# EAGLE board breakout (EAGLE 9.6.2)
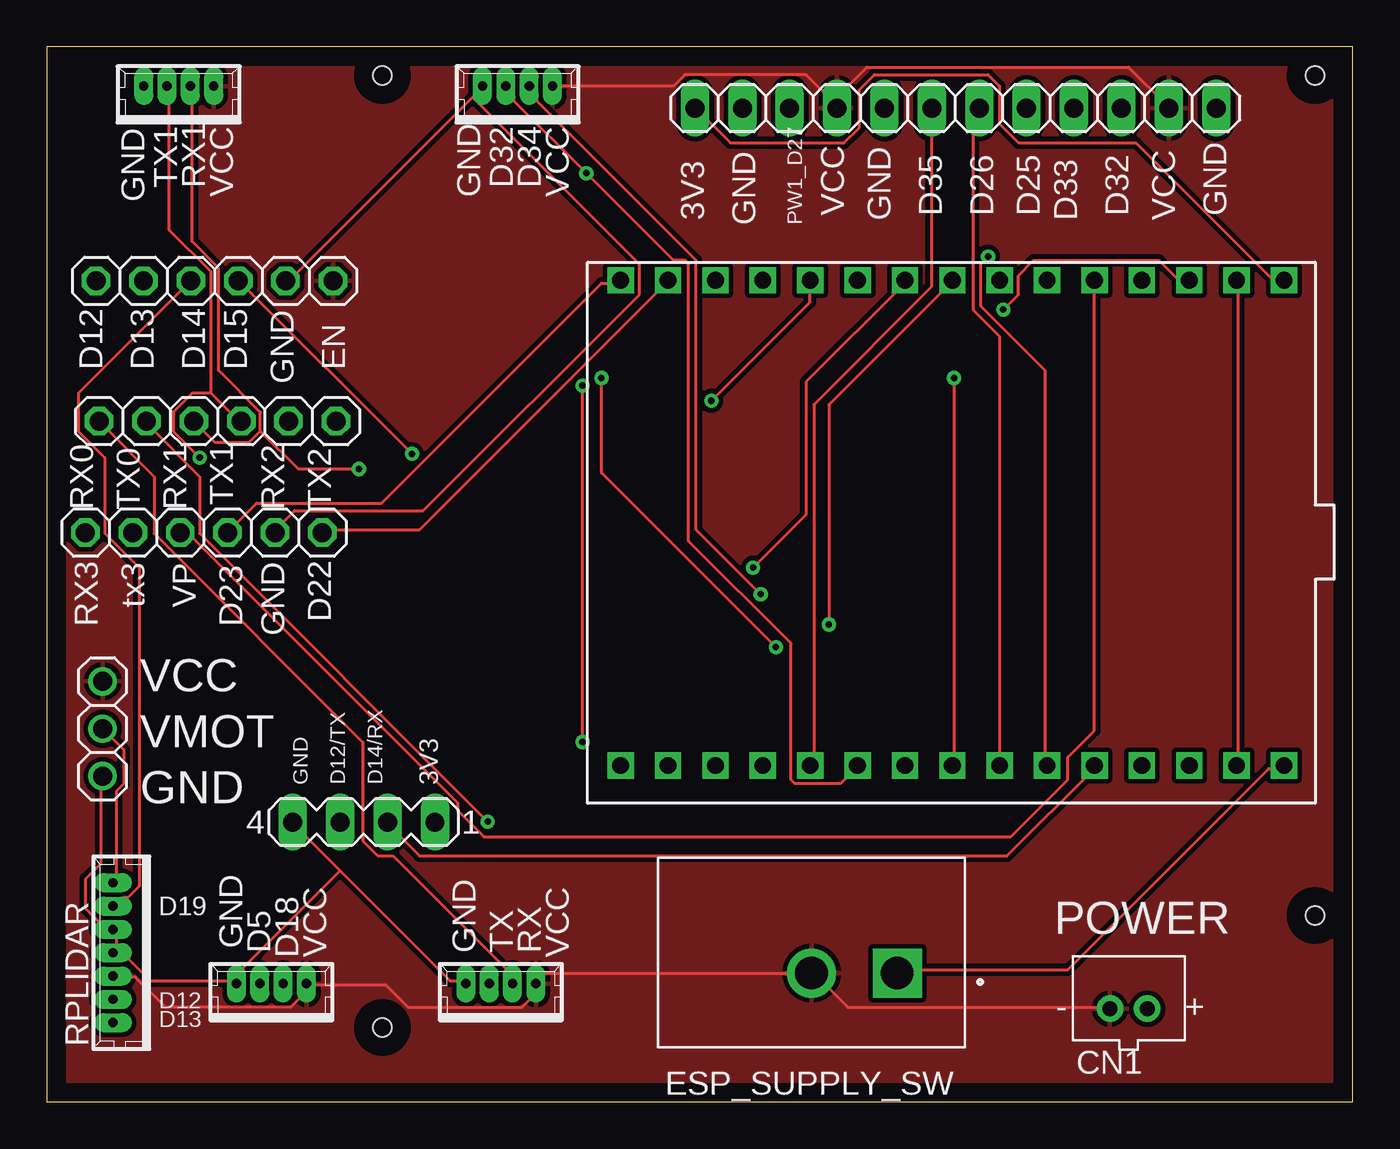
[diagram p0: board, top side]
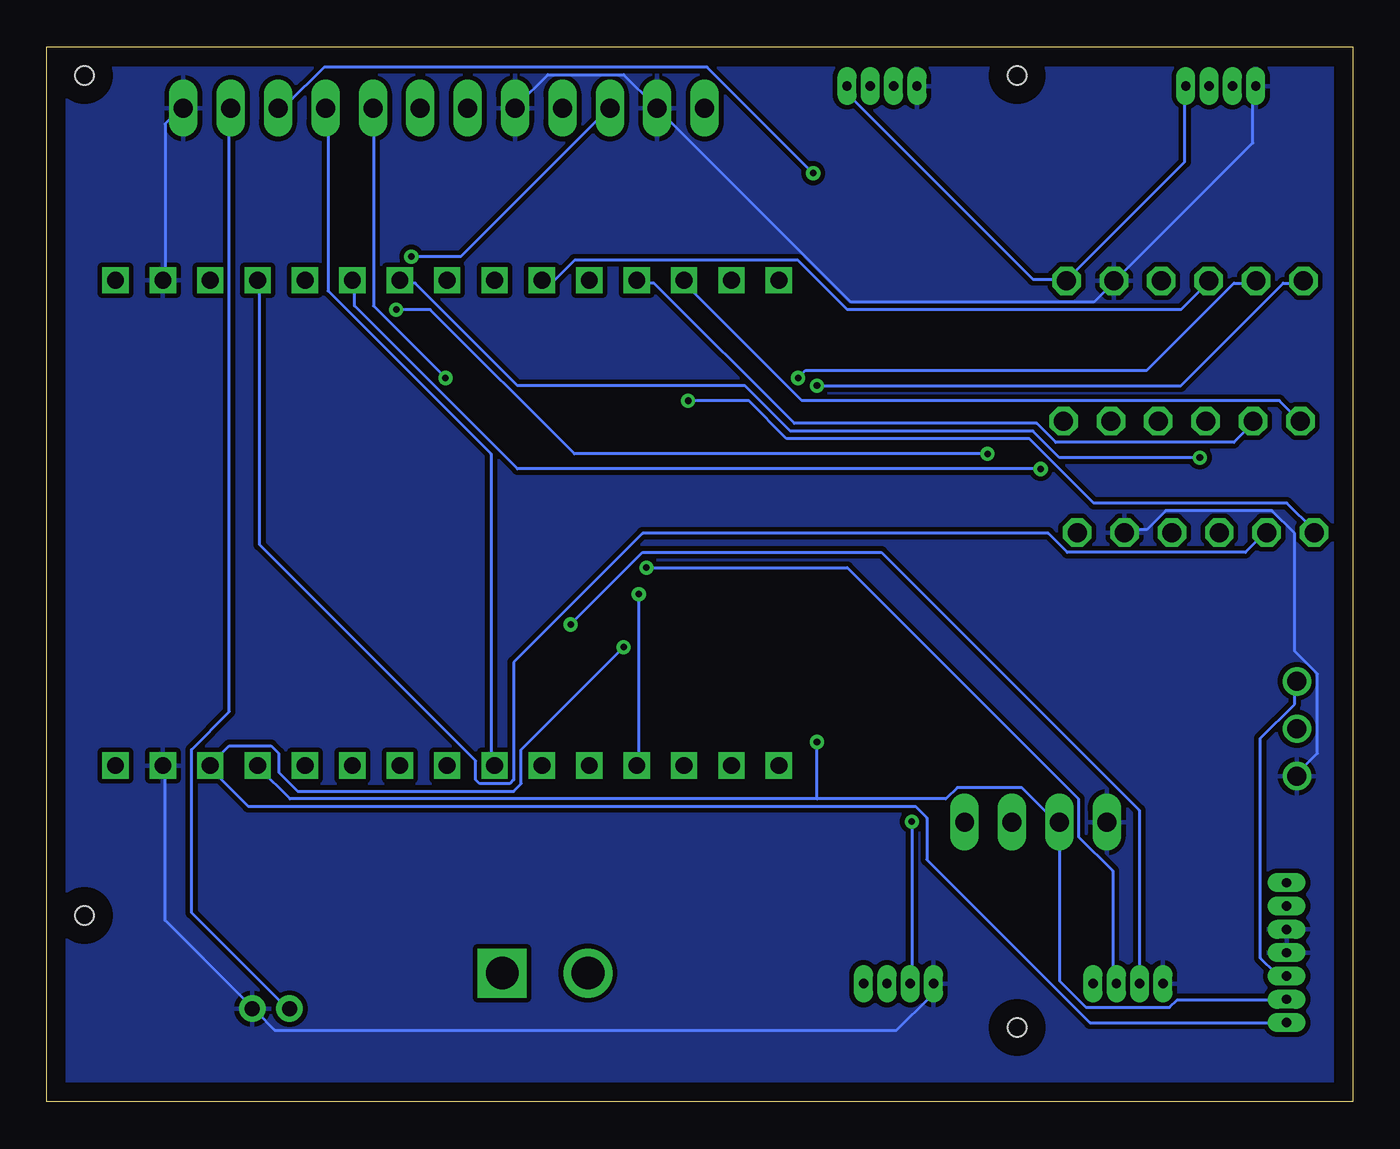
[diagram p1: board, bottom side, seen from below]

Size 70.02 x 56.55 mm. Coordinates in mm from the lower left corner, seen from the top.
Outline: 0,0 70.02,0 70.02,56.55 0,56.55 0,0
Copper layers (1*16): Top 0.035mm / dielectric 1.5mm / Bottom 0.035mm
Design rules "default *": minimum track width 6mil, minimum drill 0.35mm, track to track 10mil, track to pad 7mil, pad to pad 6mil, via to via 8mil, smd to smd 6mil, copper to edge 40mil, drill to drill 8mil, minimum pad ring 10mil, minimum via ring 8mil, stop-mask expansion 4mil, vias tented up to drill 0mil, thermal gap 10mil
Holes 1 mm at 18,4 68,10 18,55 68,55

## Footprints (pad centres in the part's own frame; a part is rotated, then mirrored left to right if it is on the bottom)
JST-PH-2-THM = drill 0.8 pad 1.422: 1 1,0; 2 -1,0
SW_GF-123-0054 = drill 1.75 square: 1 -4.6,1.09 | drill 1.75: 2 0,1.09
1X12 = drill 1.016 long: 1 -13.97,0; 2 -11.43,0; 3 -8.89,0; 4 -6.35,0; 5 -3.81,0; 6 -1.27,0; 7 1.27,0; 8 3.81,0; 9 6.35,0; 10 8.89,0; 11 11.43,0; 12 13.97,0
1X06 = drill 1.016 octagon: 1 -6.35,0; 2 -3.81,0; 3 -1.27,0; 4 1.27,0; 5 3.81,0; 6 6.35,0
1X03 = drill 1.016: 1 -2.54,0; 2 0,0; 3 2.54,0
53047-07 = drill 0.5 pad 0.698 long: 1 3.75,0.45; 2 2.5,0.45; 3 1.25,0.45; 4 0,0.45; 5 -1.25,0.45; 6 -2.5,0.45; 7 -3.75,0.45
MA04-1 = drill 1.016 long: 1 -3.81,0; 2 -1.27,0; 3 1.27,0; 4 3.81,0
ESP32-30P = drill 0.9 square: P$1 0,0; P$2 2.54,0; P$3 5.08,0; P$4 7.62,0; P$5 10.16,0; P$6 12.7,0; P$7 15.24,0; P$8 17.78,0; P$9 20.32,0; P$10 22.86,0; P$11 25.4,0; P$12 27.94,0; P$13 30.48,0; P$14 33.02,0; P$15 35.56,0; P$16 0,26; P$17 2.54,26; P$18 5.08,26; P$19 7.62,26; P$20 10.16,26; P$21 12.7,26; P$22 15.24,26; P$23 17.78,26; P$24 20.32,26; P$25 22.86,26; P$26 25.4,26; P$27 27.94,26; P$28 30.48,26; P$29 33.02,26; P$30 35.56,26
53047-04 = drill 0.5 pad 0.698 long: 1 1.875,0.45; 2 0.625,0.45; 3 -0.625,0.45; 4 -1.875,0.45

## Placement (x,y rotation side)
CN1  [JST-PH-2-THM]  58,5 0 top
ESP_SUPPLY_SW  GF-123-0054  [SW_GF-123-0054]  41,8 180 top
JP2  [1X12]  48.72,53.26 180 top
JP3  [1X06]  9.16,36.48 0 top
JP4  [1X06]  8.43,30.51 0 top
JP5  [1X06]  9,44 0 top
MOTOR_VOLTAGE  [1X03]  3,20 90 top
RPLIDAR  53047-07  [53047-07]  4,8 90 top
SV1  [MA04-1]  17,15 180 top
U$1  ESP-32_30P_BKOUT  [ESP32-30P]  66.33,44.03 180 top
X1  53047-04  [53047-04]  24.35,5.89 0 top
X2  53047-04  [53047-04]  7.08,53.99 0 top
X3  53047-04  [53047-04]  25.24,53.99 0 top
X4  53047-04  [53047-04]  12.05,5.89 0 top

## Library data of the parts
CN1 JP2-JP5 MOTOR_VOLTAGE = adafruit
ESP_SUPPLY_SW = GF-123-0054; AVAILABILITY: In Stock; DESCRIPTION: Slide Switch SPST Through Hole; MF: CW Industries; MP: GF-123-0054; PACKAGE: None; PRICE: None; PURCHASE-URL: https://pricing.snapeda.com/search/part/GF-123-0054/?ref=eda
RPLIDAR = con-molex; MF: MOLEX; MPN: 53047-0710-C; OC_FARNELL: 9732870; OC_NEWARK: 11M0149
SV1 = con-lstb; OC_FARNELL: unknown; OC_NEWARK: unknown
U$1 = esp_custom
X1-X4 = con-molex; MF: WALDOM/MOLEX; MPN: 53047-0410; OC_FARNELL: 9733060; OC_NEWARK: 38C9900

## Nets
3V3: SV1.1
D2: JP4.2 U$1.P$4
D4: JP4.3 U$1.P$5
D5: U$1.P$8 X4.3
D12: JP5.1 RPLIDAR.6 SV1.3 U$1.P$19
D13: JP5.2 RPLIDAR.7 U$1.P$18
D14: SV1.2 U$1.P$20
D15: JP5.4 U$1.P$3
D18: U$1.P$9 X4.2
D19: JP5.3 RPLIDAR.2 U$1.P$10
D21: JP4.1 U$1.P$11
D22: JP4.6 U$1.P$14
D23: JP4.4 U$1.P$15
D27: JP2.10 U$1.P$21
D32: JP2.3 U$1.P$25 X3.3
D34: U$1.P$27 X3.2
EN: U$1.P$30
GND: CN1.1 JP2.1 JP2.8 JP2.11 JP4.5 JP5.5 MOTOR_VOLTAGE.1 RPLIDAR.3 RPLIDAR.4 SV1.4 U$1.P$2 U$1.P$17 X1.4 X2.4 X3.4 X4.4
N$1: JP2.12 U$1.P$1
N$6: JP2.4 U$1.P$24
N$7: JP2.5 U$1.P$23
N$8: JP2.6 U$1.P$22
N$20: JP2.7 U$1.P$26
RX0: JP3.1 U$1.P$13 X1.2
RX1: JP3.3 U$1.P$6 X2.2
RX2: JP3.5
TX0: JP3.2 U$1.P$12 X1.3
TX1: JP3.4 U$1.P$7 X2.3
TX2: JP3.6
VCC: CN1.2 ESP_SUPPLY_SW.2 JP2.2 JP2.9 JP5.6 MOTOR_VOLTAGE.3 RPLIDAR.5 X1.1 X2.1 X3.1 X4.1
VESP: ESP_SUPPLY_SW.1 U$1.P$16
VMOT: MOTOR_VOLTAGE.2 RPLIDAR.1
VN: U$1.P$28
VP: U$1.P$29

## Tracks (layer width: path | path; a pad name or v marks a point on that pad's centre or on a via)
D2
  Bottom 0.152: U$1.P$4 58.6,43.88 58.6,29.85 47.01,18.27 47.01,17.26 46.81,17.05 45.19,17.05 44.98,17.26 44.98,23.55 38.07,30.46 16.33,30.46 15.32,29.45 5.77,29.45 4.75,30.46 JP4.2
D4
  Top 0.152: U$1.P$5 56.16,43.88 56.16,19.9 54.74,18.48 54.74,17.26 51.69,14.21 23.44,14.21 22.02,15.63 22.02,16.04 7.59,30.46 7.19,30.46 JP4.3
D5  (via drill 0.35)
  Top 0.152: v41.93,25.59 41.93,37.37 48.44,43.88 U$1.P$8
  Bottom 0.152: v41.93,25.59 38.07,29.45 25.27,29.45 11.45,15.63 11.45,6.49 X4.3
D12  (via drill 0.35)
  Top 0.152: v28.73,19.29 v28.73,38.39
  Bottom 0.152: RPLIDAR.6 3.73,5.47 9.42,5.47 9.83,5.06 14.3,5.06 15.72,6.49 15.72,14.82 SV1.3 15.93,15.02 17.75,16.85 21.21,16.85 21.82,16.24 28.73,16.24 | 28.73,16.24 56.97,16.24 58.6,17.87 U$1.P$19 | v28.73,38.39 9.22,38.39 3.73,43.88 2.72,43.88 JP5.1 | 28.73,16.24 v28.73,19.29
D13  (via drill 0.35)
  Top 0.152: v29.74,38.8 29.74,33.72 v39.09,24.37
  Bottom 0.152: RPLIDAR.7 3.73,4.25 14.1,4.25 22.83,12.99 22.83,15.22 23.44,15.83 59.21,15.83 61.24,17.87 U$1.P$18 61.24,18.07 60.22,19.09 57.99,19.09 57.58,18.68 57.58,17.66 56.56,16.65 44.98,16.65 44.58,17.05 44.58,18.88 v39.09,24.37 | v29.74,38.8 29.34,39.2 11.05,39.2 6.37,43.88 5.36,43.88 JP5.2
D14
  Top 0.152: U$1.P$20 56.16,17.87 51.48,13.19 19.99,13.19 18.36,14.82 SV1.2
D15  (via drill 0.35)
  Top 0.152: v51.28,42.45 52.09,43.27 52.09,44.28 52.91,45.09 59.61,45.09 60.63,44.08 61.24,44.08 U$1.P$3 | v19.58,34.73 10.44,43.88 JP5.4
  Bottom 0.152: v51.28,42.45 49.45,42.45 41.73,34.73 v19.58,34.73
D18  (via drill 0.35)
  Top 0.152: v37.87,28.64 40.72,31.48 40.72,38.59 46,43.88 U$1.P$9
  Bottom 0.152: v37.87,28.64 27.1,28.64 14.71,16.24 14.71,14.21 12.88,12.38 12.88,6.49 X4.2
D19
  Top 0.152: RPLIDAR.2 3.73,10.55 4.14,10.96 4.34,10.96 4.95,11.57 4.95,28.64 3.12,30.46 3.12,34.53 1.7,35.95 1.7,37.98 7.59,43.88 JP5.3
  Bottom 0.152: U$1.P$10 43.36,44.08 42.75,44.08 41.73,45.09 29.74,45.09 27.1,42.45 9.22,42.45 7.8,43.88 JP5.3
D21  (via drill 0.35)
  Top 0.152: v35.64,37.58 40.92,42.86 40.92,43.88 U$1.P$11
  Bottom 0.152: v35.64,37.58 32.38,37.58 30.35,35.54 17.35,35.54 13.89,32.09 3.53,32.09 2.11,30.67 JP4.1
D22
  Top 0.152: U$1.P$14 33.2,43.88 19.99,30.67 14.91,30.67 JP4.6
D23
  Top 0.152: U$1.P$15 30.76,43.88 29.74,43.88 17.96,32.09 11.25,32.09 9.83,30.67 JP4.4
D27  (via drill 0.35)
  Top 0.152: v50.47,45.3 50.06,44.89 50.06,42.66 53.52,39.2 53.52,18.07 U$1.P$21
  Bottom 0.152: v50.47,45.3 47.83,45.3 39.9,53.22 JP2.10
D32  (via drill 0.35)
  Top 0.152: X3.3 24.66,54.24 25.07,53.83 25.07,53.63 v28.93,49.77 33.6,45.09 34.21,45.09 34.42,44.89 34.42,30.06 39.9,24.57 39.9,17.26 40.11,17.05 42.54,17.05 43.36,17.87 U$1.P$25
  Bottom 0.152: v28.93,49.77 34.62,55.46 55.14,55.46 57.17,53.43 57.58,53.43 JP2.3
D34  (via drill 0.35)
  Top 0.152: v38.28,27.21 34.82,30.67 34.82,45.09 26.29,53.63 26.29,53.83 25.88,54.24 X3.2
  Bottom 0.152: v38.28,27.21 38.28,18.07 U$1.P$27
GND
  Top 0.152: 22.83,53.83 12.88,43.88 JP5.5 | 22.83,53.83 23.24,54.24 X3.4 | 15.72,12.38 13.28,14.82 SV1.4 | 15.72,12.38 21.61,6.49 22.43,6.49 X1.4 | 3.73,8.32 3.73,9.13 RPLIDAR.3 3.53,9.33 3.12,9.33 2.11,10.35 2.11,11.97 2.92,12.79 2.92,17.46 MOTOR_VOLTAGE.1 | 3.73,8.32 3.73,8.11 RPLIDAR.4 3.73,8.32 | 9.83,6.49 5.56,6.49 3.73,8.32 | 9.83,6.49 10.03,6.49 X4.4 9.83,6.49 | 9.83,6.49 15.72,12.38 | U$1.P$2 63.88,43.88 63.88,18.07 U$1.P$17 | 22.83,53.83 31.77,44.89 31.77,43.27 20.19,31.68 13.28,31.68 12.27,30.67 JP4.5
  Bottom 0.152: JP2.8 44.78,53.43 43.15,55.05 39.09,55.05 37.46,53.43 JP2.11 37.26,53.22 26.9,42.86 13.89,42.86 12.88,43.88 JP5.5 12.67,44.08 5.36,51.39 5.36,54.24 X2.4 | JP4.5 12.06,30.67 11.05,30.67 10.03,31.68 4.34,31.68 3.12,30.46 3.12,24.16 1.9,22.95 1.9,18.68 2.92,17.66 MOTOR_VOLTAGE.1 | U$1.P$2 63.68,44.08 63.68,52.41 62.86,53.22 JP2.1 | U$1.P$17 63.68,17.87 63.68,9.74 59,5.06 CN1.1 58.8,4.86 57.78,3.85 24.46,3.85 22.63,5.67 22.63,6.28 X1.4
  pour Bottom: 0,56 0,0 70,0 70,56
N$1
  Top 0.152: U$1.P$1 66.32,44.08 65.71,44.08 58.39,51.39 52.09,51.39 51.08,52.41 51.08,54.44 50.47,55.05 44.37,55.05 43.56,54.24 43.56,52.21 42.75,51.39 36.65,51.39 34.82,53.22 JP2.12
N$6
  Bottom 0.152: U$1.P$24 46.2,18.07 46.2,34.73 54.94,43.47 54.94,53.22 JP2.4
N$7  (via drill 0.35)
  Top 0.152: v48.64,38.8 48.64,18.07 U$1.P$23
  Bottom 0.152: v48.64,38.8 52.5,42.66 52.5,53.22 JP2.5
N$8
  Top 0.152: U$1.P$22 51.08,18.07 51.08,41.03 49.66,42.45 49.66,53.02 49.86,53.22 JP2.6
N$20
  Top 0.152: U$1.P$26 41.12,18.07 41.12,37.37 47.42,43.67 47.42,53.22 JP2.7
RX0
  Top 0.152: X1.2 24.87,6.49 24.87,6.89 18.57,13.19 17.75,13.19 16.94,14.01 16.94,19.29 5.77,30.46 5.77,33.51 2.92,36.36 JP3.1
  Bottom 0.152: U$1.P$13 35.84,43.88 29.54,37.58 3.94,37.58 2.92,36.56 JP3.1
RX1  (via drill 0.35)
  Top 0.152: 11.45,35.95 11.45,36.97 9.22,39.2 9.22,44.69 7.8,46.11 7.8,54.24 X2.2 | 11.45,35.95 10.85,35.34 9.02,35.34 8,36.36 JP3.3 | v16.74,33.92 13.49,33.92 11.45,35.95
  Bottom 0.152: v16.74,33.92 44.78,33.92 53.52,42.66 53.52,43.88 U$1.P$6
TX0  (via drill 0.35)
  Top 0.152: v23.65,15.02 8.2,30.46 8.2,33.51 5.36,36.36 JP3.2
  Bottom 0.152: v23.65,15.02 23.65,6.49 X1.3 | U$1.P$12 38.28,43.88 37.46,43.88 29.95,36.36 16.94,36.36 15.93,35.34 6.37,35.34 5.36,36.36 JP3.2
TX1  (via drill 0.35)
  Top 0.152: 8.81,37.98 8.81,44.48 6.58,46.72 6.58,54.24 X2.3 | 8.81,37.98 10.23,36.56 JP3.4 | v8.2,34.53 6.78,35.95 6.78,36.97 7.8,37.98 8.81,37.98
  Bottom 0.152: v8.2,34.53 15.72,34.53 17.14,35.95 30.15,35.95 32.59,38.39 44.78,38.39 50.27,43.88 51.08,43.88 U$1.P$7
VCC
  Top 0.152: 42.14,53.63 42.34,53.43 JP2.9 42.14,53.63 | 42.14,53.63 40.72,55.05 34.21,55.05 33.6,54.44 27.3,54.44 X3.1 | 42.14,53.63 43.97,55.46 57.99,55.46 60.02,53.43 JP2.2 | CN1.2 56.97,5.06 42.95,5.06 41.12,6.89 ESP_SUPPLY_SW.2 40.92,6.89 26.69,6.89 26.29,6.49 X1.1 26.09,6.28 26.09,5.67 25.48,5.06 19.38,5.06 18.16,6.28 14.1,6.28 X4.1 13.89,6.28 13.89,5.88 13.08,5.06 6.37,5.06 4.75,6.69 3.73,6.69 RPLIDAR.5
  Bottom 0.152: X2.1 9.02,54.24 9.02,50.38 15.32,44.08 JP5.6 15.52,44.08 17.14,44.08 27.3,54.24 X3.1 | MOTOR_VOLTAGE.3 3.12,22.54 3.12,21.32 4.95,19.49 4.95,7.71 4.14,6.89 3.73,6.89 RPLIDAR.5 | JP2.2 60.22,53.22 60.22,20.91 62.25,18.88 62.25,10.14 57.17,5.06 CN1.2
  pour Top: 0,56 0,0 3,0 70,0 70,1 70,56
VESP
  Top 0.152: U$1.P$16 66.32,17.87 65.51,17.87 54.74,7.1 45.8,7.1 ESP_SUPPLY_SW.1
VMOT
  Top 0.152: RPLIDAR.1 3.73,11.77 3.73,16.65 4.14,17.05 4.14,18.88 3.12,19.9 MOTOR_VOLTAGE.2

## Text on the board
tPlace: VCC | VMOT | GND | D19 | POWER | D12 | D13
tNames: TX1 | RX1 | VCC | GND | D32 | D34 | VCC | GND | 3V3 | GND | PW1_D27 | VCC | GND | D35 | D26 | D25 | D33 | D32 | VCC | GND | D12 | D13 | D14 | D15 | GND | EN | RX0 | TX0 | RX1 | TX1 | RX2 | TX2 | tx3 | VP | D22 | RX3 | D23 | GND | GND | D12/TX | D14/RX | 3V3 | GND | D5 | D18 | VCC | GND | TX | RX | VCC